# EAGLE board development board (EAGLE 6.3)
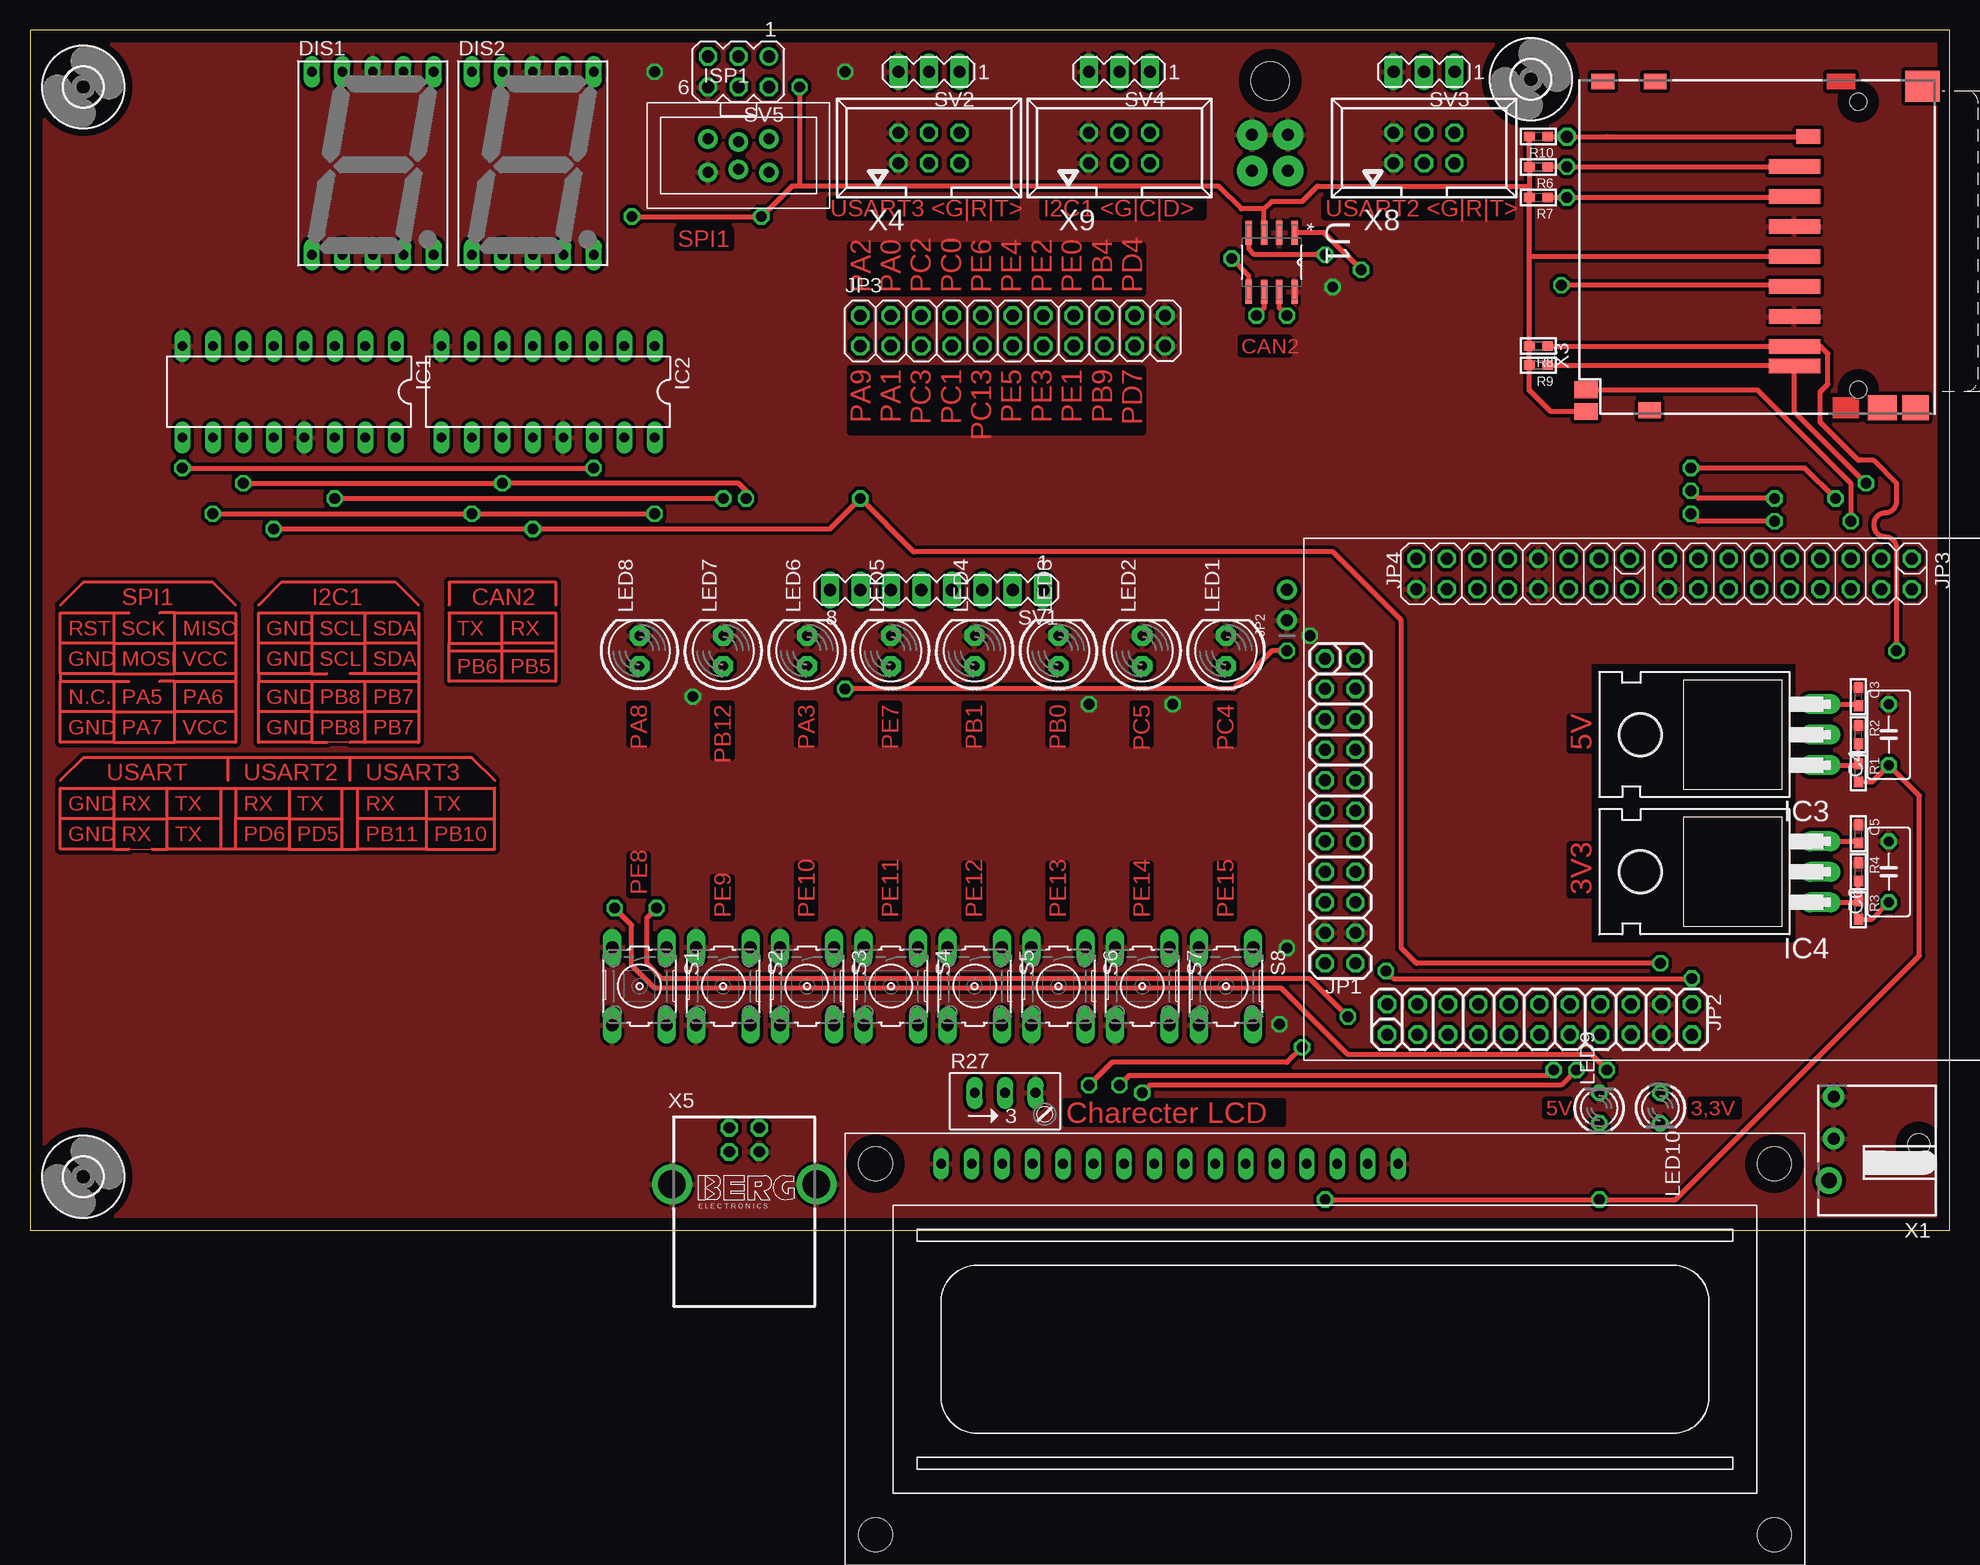
[diagram p0: board, top side]
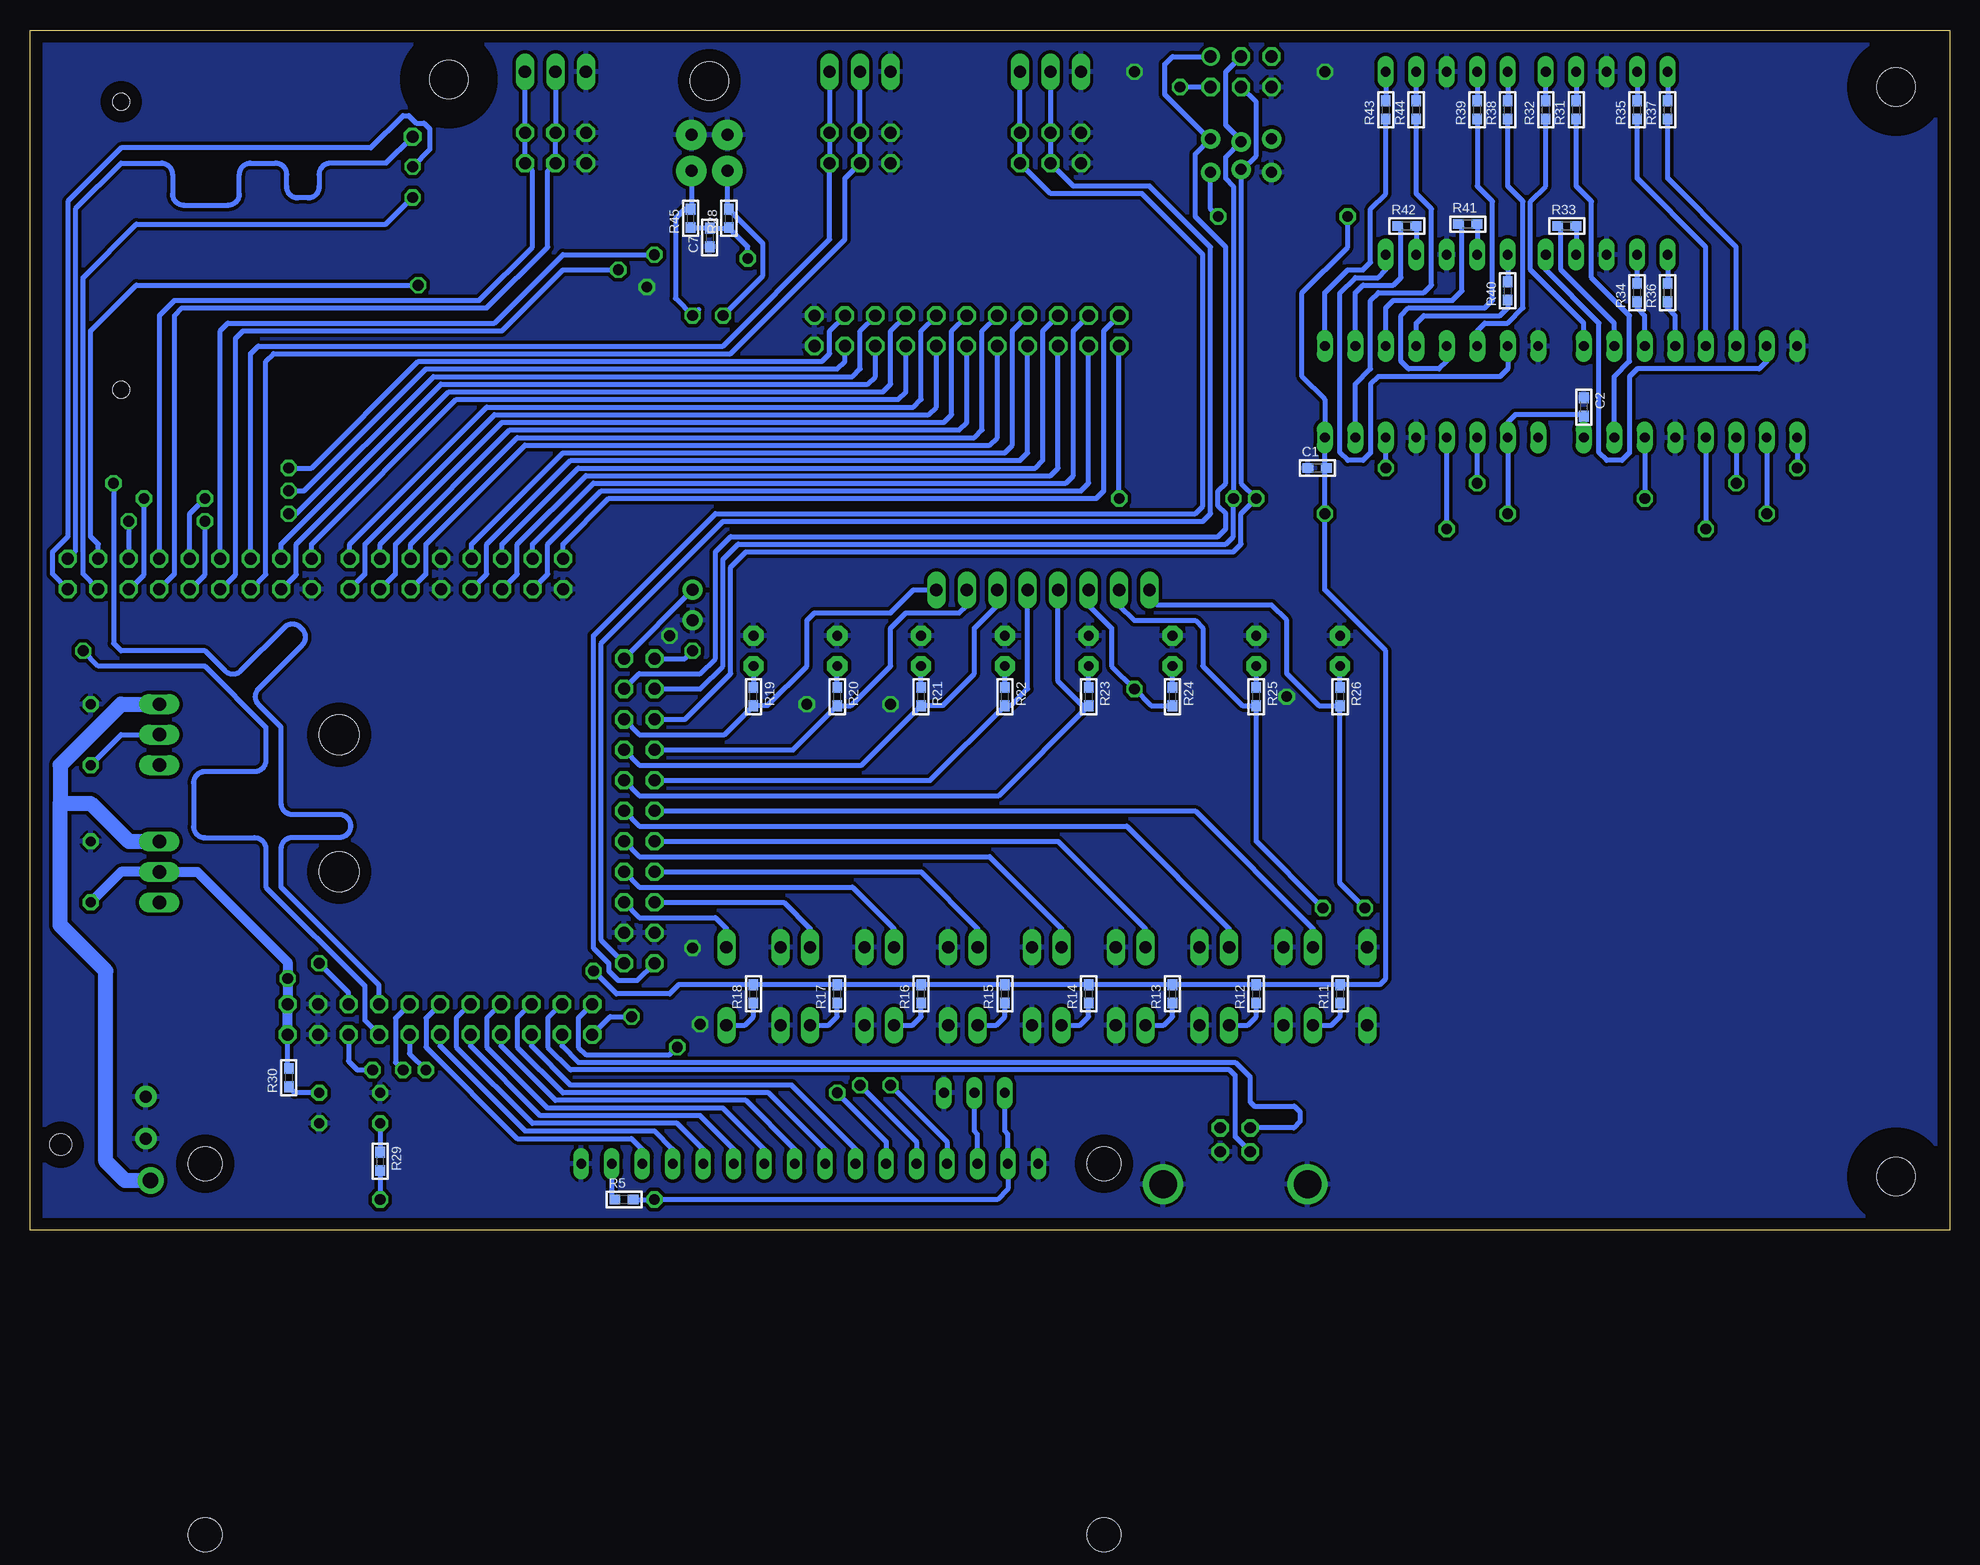
[diagram p1: board, bottom side, seen from below]

Size 160 x 100 mm. Coordinates in mm from the lower left corner, seen from the top.
Outline: 0,0 160,0 160,100 0,100 0,0
Copper layers (1*16): Top 0.035mm / dielectric 1.5mm / Bottom 0.035mm
Design rules "default *": minimum track width 10mil, minimum drill 24mil, track to track 12mil, track to pad 12mil, pad to pad 12mil, via to via 12mil, smd to smd 12mil, copper to edge 40mil, drill to drill 8mil, minimum pad ring 10mil, minimum via ring 8mil, stop-mask expansion 4mil, vias tented up to drill 0mil, thermal gap 10mil
tRestrict: area 130.2,24 to 147.2,47.1

## Footprints (pad centres in the part's own frame; a part is rotated, then mirrored left to right if it is on the bottom)
_0603 = smd 0.9 x 0.8: 1 -0.762,0; 2 0.762,0
C050-035X075 = drill 0.813 octagon: 1 -2.54,0; 2 2.54,0
HDSP-M = drill 0.813 long: 1 -5.08,-7.62; 2 -2.54,-7.62; 3 0,-7.62; 4 2.54,-7.62; 5 5.08,-7.62; 6 5.08,7.62; 7 2.54,7.62; 8 0,7.62; 9 -2.54,7.62; 10 -5.08,7.62
3,2 = hole 3.2: 0,0
DIL16 = drill 0.813 long: 1 -8.89,-3.81; 2 -6.35,-3.81; 3 -3.81,-3.81; 4 -1.27,-3.81; 5 1.27,-3.81; 6 3.81,-3.81; 7 6.35,-3.81; 8 8.89,-3.81; 9 8.89,3.81; 10 6.35,3.81; 11 3.81,3.81; 12 1.27,3.81; 13 -1.27,3.81; 14 -3.81,3.81; 15 -6.35,3.81; 16 -8.89,3.81
TO220H = drill 1.118 long: 1 -2.54,-10.16; 2 0,-10.16; 3 2.54,-10.16 | hole 3.302: 0,4.826
AVRISP-BOX = drill 0.9 pad 1.626: 1 -1.397,2.54; 2 1.397,2.54; 3 -1.143,0; 4 1.143,0; 5 -1.397,-2.54; 6 1.397,-2.54
1X02_ROUND = drill 1 pad 1.676: 1 -1.27,0; 2 1.27,0
2X11 = drill 1.016 octagon: 1 -12.7,-1.27; 2 -12.7,1.27; 3 -10.16,-1.27; 4 -10.16,1.27; 5 -7.62,-1.27; 6 -7.62,1.27; 7 -5.08,-1.27; 8 -5.08,1.27; 9 -2.54,-1.27; 10 -2.54,1.27; 11 0,-1.27; 12 0,1.27; 13 2.54,-1.27; 14 2.54,1.27; 15 5.08,-1.27; 16 5.08,1.27; 17 7.62,-1.27; 18 7.62,1.27; 19 10.16,-1.27; 20 10.16,1.27; 21 12.7,-1.27; 22 12.7,1.27
LED5MM = drill 0.813 pad 1.676 octagon: A -1.27,0; K 1.27,0
LED3MM = drill 0.813 octagon: A -1.27,0; K 1.27,0
RJ9W = drill 0.813 long: A 2.54,0.635; E -2.54,0.635; S 0,0.635
B3F-10XX = drill 1.016 long: 1 -3.251,2.261; 2 3.251,2.261; 3 -3.251,-2.261; 4 3.251,-2.261
MA08-1 = drill 1.016 long: 1 -8.89,0; 2 -6.35,0; 3 -3.81,0; 4 -1.27,0; 5 1.27,0; 6 3.81,0; 7 6.35,0; 8 8.89,0
MA03-1 = drill 1.016 long: 1 -2.54,0; 2 0,0; 3 2.54,0
MA03-2 = drill 1.016: 1 -2.54,-1.27 | drill 1.016 octagon: 2 -2.54,1.27; 3 0,-1.27; 4 0,1.27; 5 2.54,-1.27; 6 2.54,1.27
SOIC127P600X175-8N = smd 1.981 x 0.533: 1 -2.464,1.905; 2 -2.464,0.635; 3 -2.464,-0.635; 4 -2.464,-1.905; 5 2.464,-1.905; 6 2.464,-0.635; 7 2.464,0.635; 8 2.464,1.905
CPU-BOARD-JP1 = drill 1 octagon: P$1 1.27,-12.7; P$2 -1.27,-12.7; P$3 1.27,-10.16; P$4 -1.27,-10.16; P$5 1.27,-7.62; P$6 -1.27,-7.62; P$7 1.27,-5.08; P$8 -1.27,-5.08; P$9 1.27,-2.54; P$10 -1.27,-2.54; P$11 1.27,0; P$12 -1.27,0; P$13 1.27,2.54; P$14 -1.27,2.54; P$15 1.27,5.08; P$16 -1.27,5.08; P$17 1.27,7.62; P$18 -1.27,7.62; P$19 1.27,12.7; P$20 -1.27,12.7; P$21 1.27,10.16; P$22 -1.27,10.16; P$23 -3.905,18.637; P$24 -3.905,16.097; P$25 -6.445,18.637; P$26 -6.445,16.097; P$27 -8.985,18.637; P$28 -8.985,16.097; P$29 -11.525,18.637; P$30 -11.525,16.097; P$31 -14.065,18.637; P$32 -14.065,16.097; P$33 -16.605,18.637; P$34 -16.605,16.097; P$35 -19.145,18.637; P$36 -19.145,16.097; P$37 -21.685,18.637; P$38 -21.685,16.097; P$39 -24.225,18.637; P$40 -24.225,16.097; P$41 -26.765,18.637; P$42 -26.765,16.097; P$43 -29.305,18.637; P$44 -29.305,16.097; P$45 -47.625,-21.018; P$46 -47.625,-18.479; P$47 -45.085,-21.018; P$48 -45.085,-18.479; P$49 -42.545,-21.018; P$50 -42.545,-18.479; P$51 -40.005,-21.018; P$52 -40.005,-18.479; P$53 -37.465,-21.018; P$54 -37.465,-18.479; P$55 -34.925,-21.018; P$56 -34.925,-18.479; P$57 -32.385,-21.018; P$58 -32.385,-18.479; P$59 -29.845,-21.018; P$60 -29.845,-18.479; P$61 -27.305,-21.018; P$62 -27.305,-18.479; P$63 -24.115,-21.024; P$64 -24.115,-18.484; P$65 -21.575,-21.024; P$66 -21.575,-18.484; P$67 -19.035,-21.024; P$68 -19.035,-18.484; P$69 -16.495,-21.024; P$70 -16.495,-18.484; P$71 -13.955,-21.024; P$72 -13.955,-18.484; P$73 -11.415,-21.024; P$74 -11.415,-18.484; P$75 -8.875,-21.024; P$76 -8.875,-18.484; P$77 -6.335,-21.024; P$78 -6.335,-18.484
MICROFIT4SOCK = drill 1 pad 2.54: PIN1 -2,0; PIN2 1,0; PIN3 -2,-3; PIN4 1,-3 | hole 3.2: -0.5,-7.5
K375M = drill 1.3 pad 2.184: 1 -3.5,1.5 | drill 1 pad 1.8: 2 3.5,1.1; 3 0,1.1 | hole 1.8: -0.5,-6
LCD1602 = drill 0.8 long: 1 8,33.46; 2 10.54,33.46; 3 13.08,33.46; 4 15.62,33.46; 5 18.16,33.46; 6 20.7,33.46; 7 23.24,33.46; 8 25.78,33.46; 9 28.32,33.46; 10 30.86,33.46; 11 33.4,33.46; 12 35.94,33.46; 13 38.48,33.46; 14 41.02,33.46; 15 43.56,33.46; 16 46.1,33.46 | hole 2.8: 2.54,2.54; 2.54,33.46; 77.46,33.46; 77.46,2.54
SDBMF-009XXBXX2 = smd 1.2 x 4.3: 1 6.7,5.325; 2 4.2,5.325; 3 1.7,5.325; 4 -0.8,5.325; 5 -3.3,5.325; 6 -5.8,5.325; 7 -8.3,5.325; 8 -9.925,5.325 | smd 1.2 x 2: 9 9.2,4.175 | smd 2.1 x 2.4: M1 -13.4,-2 | smd 2.6 x 2.9: M2 13.4,-5.35 | smd 1.3 x 1.9: M3 -13.6,17.4; M4 13.8,16.95; M5 13.8,21.3 | smd 1.4 x 1.95: SW1 -11.9,22.7; SW3 -13.7,22.7 | smd 2.1 x 2.2: SW2 -13.4,-4.75 | hole 1.4: -11.9,0; 12.1,0
057-006-1 = drill 1 octagon: 1 -2.54,-1.27; 2 -2.54,1.27; 3 0,-1.27; 4 0,1.27; 5 2.54,-1.27; 6 2.54,1.27
PN61729-S = drill 0.95 octagon: 1 1.25,4.71; 2 -1.25,4.71; 3 -1.25,2.71; 4 1.25,2.71 | drill 2.3 pad 2.9: S1 -6.02,0; S2 6.02,0

## Placement (x,y rotation side)
C1  100n  [_0603]  52.7,63.5 0 bottom
C2  100n  [_0603]  30.48,68.58 270 bottom
C3  100n  [_0603]  152.4,44.45 270 top
C4  1u  [C050-035X075]  154.94,41.27 90 top
C5  100n  [_0603]  152.4,33.02 270 top
C6  1u  [C050-035X075]  154.94,29.84 90 top
C7  4n7  [_0603]  103.35,82.71 90 bottom
DIS1  HD-H103  [HDSP-M]  28.57,88.9 0 top
DIS2  HD-H103  [HDSP-M]  41.91,88.9 0 top
H1  MOUNT-HOLE3.2  [3,2]  4.45,95.25 0 top
H2  MOUNT-HOLE3.2  [3,2]  4.45,4.45 0 top
H3  MOUNT-HOLE3.2  [3,2]  125.09,95.89 0 top
IC1  74HC595N  [DIL16]  21.59,69.85 180 top
IC2  74HC595N  [DIL16]  43.18,69.85 180 top
IC3  317T  [TO220H]  139.06,41.27 90 top
IC4  317T  [TO220H]  139.06,29.84 90 top
ISP1  AVRISP-BOX  [AVRISP-BOX]  59.05,89.53 270 top
JP2  [1X02_ROUND]  104.78,52.07 90 top
JP3  [2X11]  81.92,74.93 0 top
LED1  [LED5MM]  99.69,48.26 90 top
LED2  [LED5MM]  92.71,48.26 90 top
LED3  [LED5MM]  85.72,48.26 90 top
LED4  [LED5MM]  78.74,48.26 90 top
LED5  [LED5MM]  71.75,48.26 90 top
LED6  [LED5MM]  64.77,48.26 90 top
LED7  [LED5MM]  57.78,48.26 90 top
LED8  [LED5MM]  50.8,48.26 90 top
LED9  [LED3MM]  130.81,10.16 90 top
LED10  [LED3MM]  135.89,10.16 270 top
R1  240  [_0603]  152.4,38.1 270 top
R2  732  [_0603]  152.4,41.27 270 top
R3  240  [_0603]  152.4,26.67 270 top
R4  400  [_0603]  152.4,29.84 270 top
R5  240  [_0603]  110.49,2.54 0 bottom
R6  47k  [_0603]  125.73,88.58 180 top
R7  47k  [_0603]  125.73,86.04 180 top
R8  47k  [_0603]  125.73,73.66 180 top
R9  47k  [_0603]  125.73,72.07 180 top
R10  47k  [_0603]  125.73,91.12 180 top
R11  240  [_0603]  50.8,19.68 90 bottom
R12  240  [_0603]  57.78,19.68 90 bottom
R13  240  [_0603]  64.77,19.68 90 bottom
R14  240  [_0603]  71.75,19.68 90 bottom
R15  240  [_0603]  78.74,19.68 90 bottom
R16  240  [_0603]  85.72,19.68 90 bottom
R17  240  [_0603]  92.71,19.68 90 bottom
R18  240  [_0603]  99.69,19.68 90 bottom
R19  100  [_0603]  99.69,44.45 270 bottom
R20  100  [_0603]  92.71,44.45 270 bottom
R21  100  [_0603]  85.72,44.45 270 bottom
R22  100  [_0603]  78.74,44.45 270 bottom
R23  100  [_0603]  71.75,44.45 270 bottom
R24  100  [_0603]  64.77,44.45 270 bottom
R25  100  [_0603]  57.78,44.45 270 bottom
R26  100  [_0603]  50.8,44.45 270 bottom
R27  [RJ9W]  81.28,10.79 0 top
R28  60  [_0603]  101.76,84.3 90 bottom
R29  150  [_0603]  130.81,5.71 270 bottom
R30  100  [_0603]  138.43,12.7 90 bottom
R31  120  [_0603]  31.11,93.34 90 bottom
R32  120  [_0603]  33.66,93.34 90 bottom
R33  120  [_0603]  31.91,83.66 0 bottom
R34  120  [_0603]  26.04,78.11 90 bottom
R35  120  [_0603]  26.04,93.34 90 bottom
R36  120  [_0603]  23.5,78.11 90 bottom
R37  120  [_0603]  23.5,93.34 90 bottom
R38  120  [_0603]  36.83,93.34 90 bottom
R39  120  [_0603]  39.37,93.34 90 bottom
R40  120  [_0603]  36.83,78.26 90 bottom
R41  120  [_0603]  40.16,83.82 0 bottom
R42  120  [_0603]  45.24,83.66 0 bottom
R43  120  [_0603]  46.99,93.34 90 bottom
R44  120  [_0603]  44.45,93.34 90 bottom
R45  60  [_0603]  104.93,84.3 90 bottom
S1  [B3F-10XX]  50.8,20.32 270 top
S2  [B3F-10XX]  57.78,20.32 270 top
S3  [B3F-10XX]  64.77,20.32 270 top
S4  [B3F-10XX]  71.75,20.32 270 top
S5  [B3F-10XX]  78.74,20.32 270 top
S6  [B3F-10XX]  85.72,20.32 270 top
S7  [B3F-10XX]  92.71,20.32 270 top
S8  [B3F-10XX]  99.69,20.32 270 top
SV1  [MA08-1]  75.56,53.34 180 top
SV2  [MA03-1]  74.93,96.52 180 top
SV3  [MA03-1]  116.2,96.52 180 top
SV4  [MA03-1]  90.81,96.52 180 top
SV5  [MA03-2]  59.05,96.52 180 top
U1  MAX13052ESA+  [SOIC127P600X175-8N]  103.5,80.64 270 top
U$1  CPU-BOARD  [CPU-BOARD-JP1]  109.22,34.92 180 top
U$57  MICROFIT4  [MICROFIT4SOCK]  102.87,88.27 180 top
X1  K375M  [K375M]  151.45,7.62 90 top
X2  HD44780LCD-1602  [LCD1602]  67.94,-27.94 0 top
X3  SDBMF  [SDBMF-009XXBXX2]  152.4,81.92 90 top
X4  057-006-1  [057-006-1]  74.93,90.17 0 top
X5  PN61729-S  [PN61729-S]  59.53,3.81 0 top
X8  057-006-1  [057-006-1]  116.2,90.17 0 top
X9  057-006-1  [057-006-1]  90.81,90.17 0 top

## Library data of the parts
C1-C3 C5 C7 JP2 R1-R26 R28-R45 = microbuilder
C4 C6 = rcl
DIS1 DIS2 = display-hp; OC_FARNELL: unknown; OC_NEWARK: unknown
H1-H3 = holes
IC1 IC2 = 74xx-eu
IC3 IC4 = linear
ISP1 LED1-LED8 X2 = adafruit
JP3 = pinhead
LED9 LED10 = led
R27 = pot
S1-S8 = switch-omron; MPN: B3F-1000; OC_FARNELL: 176432; OC_NEWARK: 36M3542
SV1-SV5 = con-lstb; OC_FARNELL: unknown; OC_NEWARK: unknown
U1 = Maxim_By_element14_Batch_1; MPN: MAX13052ESA+; OC_FARNELL: 1600112; OC_NEWARK: 99K2875; PACKAGE: SOIC-8; SUPPLIER: Maxim
U$1 = unicorn_v2
U$57 = unicorn
X1 = con-shallin
X3 = farnell
X4 X8 X9 = con-panduit; OC_FARNELL: unknown; OC_NEWARK: unknown
X5 = con-berg; OC_FARNELL: unknown; OC_NEWARK: unknown

## Nets
3.3V: C1.2 C2.2 C6.1 IC1.10 IC1.16 IC2.10 IC2.16 IC4.2 ISP1.2 R3.2 R6.2 R7.2 R8.2 R9.2 R10.2 R11.2 R12.2 R13.2 R14.2 R15.2 R16.2 R17.2 R18.2 R30.2 SV5.2 U1.3 U$1.P$43 U$1.P$44 X3.4 X3.SW3
5.0V: C4.1 IC3.2 R1.2 R5.2 R27.E R29.2 X2.2
12V: C3.2 C5.2 IC3.3 IC4.3 X1.1
CAN_RX: U1.4 U$1.P$55
CAN_TX: U1.1 U$1.P$56
CANH: R45.2 U1.7 U$57.PIN1
CANL: R28.2 U1.6 U$57.PIN2
D+: U$1.P$26 X5.3
D-: U$1.P$25 X5.2
DAC: JP2.2 U$1.P$2
DB0: U$1.P$27 X2.7
DB1: U$1.P$28 X2.8
DB2: U$1.P$29 X2.9
DB3: U$1.P$30 X2.10
DB4: U$1.P$31 X2.11
DB5: U$1.P$32 X2.12
DB6: U$1.P$33 X2.13
DB7: U$1.P$34 X2.14
E: U$1.P$36 X2.6
GND: C1.1 C2.1 C3.1 C4.2 C5.1 C6.2 C7.1 DIS1.3 DIS1.8 DIS2.3 DIS2.8 IC1.8 IC1.13 IC2.8 IC2.13 ISP1.6 JP2.1 JP3.21 JP3.22 LED1.K LED2.K LED3.K LED4.K LED5.K LED6.K LED7.K LED8.K LED9.K LED10.K R2.1 R4.1 R27.A S1.3 S1.4 S2.3 S2.4 S3.3 S3.4 S4.3 S4.4 S5.3 S5.4 S6.3 S6.4 S7.3 S7.4 S8.3 S8.4 SV2.3 SV3.3 SV4.3 SV5.6 U1.2 U1.8 U$1.P$21 U$1.P$22 U$1.P$41 U$1.P$42 U$1.P$62 U$1.P$69 U$1.P$70 U$1.P$78 U$57.PIN3 U$57.PIN4 X1.2 X1.3 X2.1 X2.16 X3.3 X3.6 X4.1 X4.2 X5.4 X5.S1 X5.S2 X8.1 X8.2 X9.1 X9.2
LED1: R19.2 SV1.1 U$1.P$6
LED2: R20.2 SV1.2 U$1.P$7
LED3: R21.2 SV1.3 U$1.P$8
LED4: R22.2 SV1.4 U$1.P$9
LED5: R23.2 SV1.5 U$1.P$10
LED6: R24.2 SV1.6 U$1.P$1
LED7: R25.2 SV1.7 U$1.P$23
LED8: R26.2 SV1.8 U$1.P$39
N$1: DIS2.5 IC2.7
N$2: IC2.6 R38.1
N$3: IC2.5 R39.1
N$4: IC2.4 R40.1
N$5: IC2.3 R41.1
N$6: IC2.2 R42.1
N$7: IC2.1 R43.1
N$8: IC2.15 R44.1
N$9: IC1.9 IC2.14
N$10: DIS1.5 IC1.7
N$11: IC1.6 R37.1
N$12: IC1.5 R35.1
N$13: IC1.4 R36.1
N$14: IC1.3 R34.1
N$15: IC1.2 R33.1
N$16: IC1.1 R32.1
N$17: IC1.15 R31.1
N$18: R5.1 X2.15
N$19: R11.1 S1.2
N$20: LED10.A R30.1
N$21: R12.1 S2.2
N$22: IC3.1 R1.1 R2.2
N$23: R13.1 S3.2
N$24: IC4.1 R3.1 R4.2
N$25: R14.1 S4.2
N$26: R15.1 S5.2
N$27: R16.1 S6.2
N$28: R17.1 S7.2
N$29: R18.1 S8.2
N$30: LED1.A R19.1
N$31: LED9.A R29.1
N$32: LED2.A R20.1
N$34: LED3.A R21.1
N$36: LED4.A R22.1
N$38: LED5.A R23.1
N$40: LED6.A R24.1
N$42: LED7.A R25.1
N$44: LED8.A R26.1
N$51: DIS1.7 R31.2
N$52: DIS1.6 R32.2
N$60: DIS1.4 R33.2
N$61: DIS1.2 R34.2
N$62: DIS1.9 R35.2
N$63: DIS1.1 R36.2
N$64: DIS1.10 R37.2
N$65: DIS2.10 R38.2
N$66: DIS2.9 R39.2
N$67: DIS2.1 R40.2
N$68: DIS2.2 R41.2
N$69: DIS2.4 R42.2
N$70: DIS2.6 R43.2
N$71: DIS2.7 R44.2
N$72: C7.2 R28.1 R45.1 U1.5
PA0: JP3.4 U$1.P$75
PA1: JP3.3 U$1.P$76
PA2: JP3.2 U$1.P$77
PA9: IC1.12 IC2.12 JP3.1 U$1.P$40
PB4: JP3.18 U$1.P$54
PB9: JP3.17 U$1.P$59
PC0: JP3.8 U$1.P$71
PC1: JP3.7 U$1.P$72
PC2: JP3.6 U$1.P$73
PC3: JP3.5 U$1.P$74
PC13: JP3.9 U$1.P$68
PD4: JP3.20 U$1.P$50
PD7: JP3.19 U$1.P$53
PE0: JP3.16 U$1.P$60
PE1: JP3.15 U$1.P$61
PE2: JP3.14 U$1.P$63
PE3: JP3.13 U$1.P$64
PE4: JP3.12 U$1.P$65
PE5: JP3.11 U$1.P$66
PE6: JP3.10 U$1.P$67
RS: U$1.P$24 X2.4
RW: U$1.P$35 X2.5
SCL: SV4.2 U$1.P$58 X9.3 X9.4
SD_IN: U$1.P$49 X3.SW1
SDA: SV4.1 U$1.P$57 X9.5 X9.6
SDIO_CK: U$1.P$47 X3.5
SDIO_CMD: R7.1 U$1.P$48 X3.2
SDIO_D0: R8.1 U$1.P$37 X3.7
SDIO_D1: R9.1 U$1.P$38 X3.8
SDIO_D2: R10.1 U$1.P$45 X3.9
SDIO_D3: R6.1 U$1.P$46 X3.1
SPI_MISO: ISP1.1 SV5.1 U$1.P$4
SPI_MOSI: IC1.14 ISP1.4 SV5.4 U$1.P$5
SPI_SCK: IC1.11 IC2.11 ISP1.3 SV5.3 U$1.P$3
SW1: S1.1 U$1.P$11
SW2: S2.1 U$1.P$12
SW3: S3.1 U$1.P$13
SW4: S4.1 U$1.P$14
SW5: S5.1 U$1.P$15
SW6: S6.1 U$1.P$16
SW7: S7.1 U$1.P$17
SW8: S8.1 U$1.P$18
USART1_RX: SV2.2 U$1.P$20 X4.3 X4.4
USART1_TX: SV2.1 U$1.P$19 X4.5 X4.6
USART2_RX: SV3.2 U$1.P$52 X8.3 X8.4
USART2_TX: SV3.1 U$1.P$51 X8.5 X8.6
VO: R27.S X2.3

## Tracks (layer width: path | path; a pad name or v marks a point on that pad's centre or on a via)
3.3V  (via drill 0.9)
  Top 0.406: R3.2 153.54,25.91 C6.1 | 124.97,87 R6.2 R10.2 | 124.97,87 R7.2 | U1.3 102.87,85.09 | 102.87,85.09 103.5,85.72 106.05,85.72 107.31,87 124.97,87 | 124.97,85.72 R7.2 | v50.16,84.45 v60.96,84.45 63.5,87 64.14,87 | 102.87,85.09 100.97,85.09 99.06,87 64.14,87 | v52.07,59.69 v36.83,59.69 v15.24,59.69 | v64.14,95.25 64.14,87 | v113.03,21.59 113.67,20.95 v138.53,20.95 | X3.SW3 126.73,68.22 124.97,69.98 R9.2 R8.2 124.97,81.11 | X3.4 124.97,81.11 | 124.97,81.11 R7.2
  Bottom 0.406: v60.96,84.45 61.59,85.09 ISP1.2 | IC1.10 v15.24,59.69 | v36.83,59.69 IC2.10 36.83,67.31 36.2,67.94 30.48,67.94 C2.2 IC1.16 | 52.07,63.5 v52.07,59.69 52.07,53.34 46.99,48.26 46.99,20.95 47.5,20.45 R11.2 R12.2 R13.2 R14.2 R15.2 R16.2 R17.2 R18.2 105.92,20.45 106.68,19.68 111.12,19.68 v113.03,21.59 | 52.07,63.5 IC2.16 52.07,69.22 53.98,71.12 53.98,78.11 50.16,81.92 v50.16,84.45 | C1.2 52.07,63.5 | R30.2 138.53,13.56 U$1.P$43 | SV5.2 v64.14,95.25
  Bottom 0.813: U$1.P$43 U$1.P$44 v138.53,20.95 138.53,22.32 146.05,29.84 IC4.2 152.4,29.84 C6.1
5.0V  (via drill 0.9)
  Top 0.406: R1.2 153.54,37.34 C4.1 157.48,36.2 157.48,22.86 137.16,2.54 v130.81,2.54 v107.95,2.54
  Bottom 0.406: R27.E 78.74,8.26 78.48,8 X2.2 78.48,3.43 79.38,2.54 v107.95,2.54 R5.2 | C4.1 152.4,41.27 IC3.2 | R29.2 v130.81,2.54
12V
  Top 0.406: IC3.3 152.27,43.81 C3.2 | IC4.3 152.27,32.38 C5.2
  Bottom 1.27: X1.1 152.07,4.12 153.67,5.71 153.67,21.59 157.48,25.4 157.48,35.56 | IC3.3 152.4,43.81 157.48,38.73 157.48,35.56 | 157.48,35.56 154.94,35.56 151.76,32.38 IC4.3
CAN_RX  (via drill 0.9)
  Top 0.406: v107.95,81.28 102.08,81.28 101.6,81.76 U1.4
  Bottom 0.406: U$1.P$55 144.15,74.93 143.51,75.56 121.28,75.56 115.57,81.28 v107.95,81.28
CAN_TX  (via drill 0.9)
  Top 0.406: v110.97,80.01 107.87,83.11 U1.1
  Bottom 0.406: U$1.P$56 144.08,53.4 142.88,54.61 142.88,74.3 142.24,74.93 120.65,74.93 115.57,80.01 v110.97,80.01
CANH  (via drill 0.9)
  Top 0.406: v104.78,76.2 104.14,76.83 U1.7
  Bottom 0.406: U$57.PIN1 104.87,85.12 R45.2 105.44,85.06 106.2,84.3 106.2,77.63 v104.78,76.2 104.27,76.71
CANL  (via drill 0.9)
  Top 0.406: U1.6 102.87,76.83 v102.23,76.2
  Bottom 0.406: U$57.PIN2 101.87,85.17 R28.2 98.9,82.2 98.9,79.53 v102.23,76.2
D+
  Bottom 0.406: U$1.P$26 116.84,17.65 116.84,15.24 114.94,13.34 60.01,13.34 59.53,12.86 59.53,7.77 X5.3
D-
  Bottom 0.406: U$1.P$25 115.67,15.34 114.3,13.97 59.53,13.97 58.28,12.72 58.28,10.66 57.94,10.32 54.61,10.32 54.13,9.84 54.13,9.05 54.66,8.52 X5.2
DAC
  Bottom 0.406: U$1.P$2 JP2.2
DB0
  Bottom 0.406: X2.7 91.19,6.73 96.52,12.06 114.94,12.06 118.2,15.34 U$1.P$27
DB1
  Bottom 0.406: X2.8 93.72,6.73 98.42,11.43 115.57,11.43 119.38,15.24 119.38,17.65 U$1.P$28
DB2
  Bottom 0.406: X2.9 96.27,6.73 100.33,10.79 116.2,10.79 120.75,15.34 U$1.P$29
DB3
  Bottom 0.406: X2.10 98.81,6.73 102.23,10.16 116.84,10.16 121.92,15.24 121.92,17.65 U$1.P$30
DB4
  Bottom 0.406: X2.11 101.34,6.73 104.14,9.53 117.47,9.53 123.28,15.34 U$1.P$31
DB5
  Bottom 0.406: X2.12 103.89,6.73 106.05,8.89 118.11,8.89 124.46,15.24 124.46,17.65 U$1.P$32
DB6
  Bottom 0.406: X2.13 106.42,6.73 107.95,8.26 118.75,8.26 125.83,15.34 U$1.P$33
DB7
  Bottom 0.406: U$1.P$34 127,17.65 127,15.24 119.38,7.62 109.86,7.62 108.97,6.73 X2.14
E  (via drill 0.9)
  Top 0.406: v128.91,13.34 127.64,12.06 93.34,12.06 v92.71,11.43
  Bottom 0.406: U$1.P$36 129.54,17.65 129.54,13.97 v128.91,13.34 | v92.71,11.43 88.64,7.37 X2.6
GND  (via drill 0.9)
  other vias: 104.78,23.5 104.14,17.14 106.68,49.53 95.25,43.81 88.27,43.81 55.24,44.45 52.07,96.52 67.94,96.52 108.58,78.58
  pour Bottom: 0,100.33 160.02,100.33 160.02,0 0,0
  pour Top: 0,100.33 160.02,100.33 160.02,0 0,0
LED1
  Bottom 0.406: 99.69,43.81 R19.2 | U$1.P$6 109.22,41.27 102.11,41.27 R19.2 | SV1.1 86.36,53.34 88.27,51.44 94.61,51.44 95.25,50.8 95.25,46.99 98.55,43.69 R19.2
LED2
  Bottom 0.406: U$1.P$7 96.39,40.01 R20.2 91.57,43.69 88.27,46.99 88.27,50.16 87,51.44 82.55,51.44 81.92,52.07 SV1.2
LED3
  Bottom 0.406: U$1.P$8 109.22,38.73 90.68,38.73 R21.2 | R21.2 85.6,43.81 | SV1.3 79.38,52.07 81.28,50.16 81.28,46.35 83.95,43.69 R21.2
LED4
  Bottom 0.406: U$1.P$9 84.96,37.47 R22.2 | R22.2 78.61,43.81 | SV1.4 76.83,45.09 78.23,43.69 R22.2
LED5
  Bottom 0.406: U$1.P$10 109.22,36.2 79.25,36.2 R23.2 | R23.2 71.88,43.81 | SV1.5 74.3,45.72 72.26,43.69 R23.2
LED6  (via drill 0.9)
  Top 0.406: v104.78,48.26 103.5,48.26 100.33,45.09 v67.94,45.09
  Bottom 0.406: U$1.P$1 105.41,47.62 v104.78,48.26 | R24.2 66.55,43.69 v67.94,45.09 69.85,46.99 69.85,50.16 71.75,52.07 SV1.6
LED7  (via drill 0.9)
  Top 0.406: v109.86,17.78 106.68,20.95 52.7,20.95 51.44,22.23 51.44,26.04 v52.23,26.83
  Bottom 0.406: U$1.P$23 111.63,17.78 v109.86,17.78 | v52.23,26.83 57.78,32.38 R25.2 58.93,43.69 62.23,46.99 62.23,50.16 62.87,50.8 67.94,50.8 69.22,52.07 SV1.7
LED8  (via drill 0.9)
  Top 0.406: v48.74,26.83 50.16,25.4 50.16,22.07 52.07,20.16 104.3,20.16 109.86,14.61 130.18,14.61 v131.44,13.34
  Bottom 0.406: v48.74,26.83 50.8,28.89 R26.2 | R26.2 50.93,43.81 | R26.2 52.58,43.69 55.24,46.35 55.24,50.8 56.52,52.07 66.04,52.07 66.67,52.7 SV1.8 | U$1.P$39 133.44,14.06 132.72,13.34 v131.44,13.34
N$1
  Bottom 0.406: IC2.7 36.83,71.75 37.47,71.12 47.62,71.12 48.26,70.48 48.26,64.77 48.9,64.14 50.16,64.14 50.8,64.77 50.8,78.11 49.53,79.38 47.62,79.38 46.99,80.01 DIS2.5
N$2
  Bottom 0.406: IC2.6 39.37,74.93 38.73,75.56 36.83,75.56 35.56,76.83 35.56,85.72 36.83,87 R38.1
N$3
  Bottom 0.406: IC2.5 41.91,72.39 42.55,71.75 45.09,71.75 45.72,72.39 45.72,76.2 45.09,76.83 38.73,76.83 38.1,77.47 38.1,85.72 39.37,87 R39.1
N$4
  Bottom 0.406: IC2.4 44.45,75.56 43.81,76.2 37.47,76.2 36.83,76.83 R40.1
N$5
  Bottom 0.406: IC2.3 46.99,76.83 46.35,77.47 41.43,77.47 40.64,78.26 40.64,83.53 R41.1
N$6
  Bottom 0.406: IC2.2 49.53,78.11 48.9,78.74 46.35,78.74 45.72,79.38 45.72,83.38 R42.1
N$7
  Bottom 0.406: IC2.1 52.07,78.11 50.16,80.01 48.9,80.01 48.26,80.64 48.26,85.09 46.99,86.36 R43.1
N$8
  Bottom 0.406: IC2.15 49.53,70.48 48.26,71.75 48.26,77.47 47.62,78.11 43.81,78.11 43.18,78.74 43.18,85.09 44.45,86.36 R44.1
N$9  (via drill 0.9)
  Top 0.406: v12.7,63.5 v46.99,63.5
  Bottom 0.406: IC1.9 v12.7,63.5 | v46.99,63.5 IC2.14
N$10
  Bottom 0.406: IC1.7 15.24,72.39 15.88,71.75 26.04,71.75 26.67,71.12 26.67,64.77 27.3,64.14 28.57,64.14 29.21,64.77 29.21,75.56 33.66,80.01 DIS1.5
N$11
  Bottom 0.406: IC1.6 17.78,81.92 23.5,87.63 R37.1
N$12
  Bottom 0.406: IC1.5 20.32,81.92 26.04,87.63 R35.1
N$13
  Bottom 0.406: IC1.4 22.86,76.2 23.5,76.83 R36.1
N$14
  Bottom 0.406: IC1.3 25.4,76.2 26.04,76.83 R34.1
N$15
  Bottom 0.406: IC1.2 27.94,75.56 32.38,80.01 32.38,83.38 R33.1
N$16
  Bottom 0.406: IC1.1 30.48,75.56 34.92,80.01 34.92,85.72 33.66,87 R32.1
N$17
  Bottom 0.406: IC1.15 27.94,71.12 26.67,72.39 26.67,76.2 29.84,79.38 29.84,85.72 31.11,87 R31.1
N$18
  Bottom 0.406: X2.15 111.5,2.79 R5.1
N$19
  Bottom 0.406: S1.2 51.51,17.07 50.8,17.78 R11.1
N$20
  Bottom 0.406: LED10.A 137.92,11.43 R30.1
N$21
  Bottom 0.406: S2.2 58.5,17.07 57.78,17.78 R12.1
N$22
  Top 0.406: IC3.1 152.27,38.73 R1.1 R2.2
N$23
  Bottom 0.406: S3.2 65.48,17.07 64.77,17.78 R13.1
N$24
  Top 0.406: IC4.1 152.27,27.3 R3.1 R4.2
N$25
  Bottom 0.406: S4.2 72.47,17.07 71.75,17.78 R14.1
N$26
  Bottom 0.406: S5.2 79.45,17.07 78.74,17.78 R15.1
N$27
  Bottom 0.406: S6.2 86.44,17.07 85.72,17.78 R16.1
N$28
  Bottom 0.406: S7.2 93.42,17.07 92.71,17.78 R17.1
N$29
  Bottom 0.406: S8.2 100.41,17.07 99.69,17.78 R18.1
N$30
  Bottom 0.406: LED1.A R19.1
N$31
  Bottom 0.406: LED9.A R29.1
N$32
  Bottom 0.406: R20.1 LED2.A
N$33
  Top 0.254: 6.99,51.44 2.54,51.44 2.54,48.9 | 6.99,51.44 6.99,48.9 | 6.99,48.9 6.99,46.35 | 6.99,46.35 12.06,46.35 | 12.06,46.35 12.06,48.9 | 12.06,48.9 12.06,51.44 | 12.06,51.44 17.14,51.44 17.14,48.9 | 17.14,48.9 17.14,46.35 | 6.99,46.35 2.54,46.35 | 2.54,46.35 2.54,48.9 | 17.14,46.35 12.06,46.35 | 17.14,48.9 12.06,48.9 | 6.99,48.9 12.06,48.9 | 6.99,48.9 2.54,48.9 | 2.54,45.72 6.99,45.72 | 6.99,45.72 6.99,43.18 | 6.99,43.18 6.99,40.64 | 6.99,40.64 12.06,40.64 | 12.06,40.64 12.06,43.18 | 12.06,43.18 12.06,45.72 | 12.06,45.72 17.14,45.72 | 17.14,45.72 17.14,43.18 | 17.14,43.18 17.14,40.64 12.06,40.64 | 6.99,40.64 2.54,40.64 2.54,43.18 | 2.54,43.18 2.54,45.72 | 17.14,43.18 12.06,43.18 | 6.99,43.18 12.06,43.18 | 6.99,43.18 2.54,43.18 | 2.54,46.35 2.54,45.72 | 17.14,46.35 17.14,45.72 | 6.99,51.44 8.26,51.44 | 12.06,51.44 10.79,51.44 | 6.99,45.72 8.26,45.72 | 12.06,45.72 10.79,45.72
N$34
  Bottom 0.406: R21.1 LED3.A
N$35
  Top 0.254: 2.54,52.07 4.45,53.98 15.24,53.98 17.14,52.07
N$36
  Bottom 0.406: R22.1 LED4.A
N$37
  Top 0.254: 34.92,48.9 34.92,51.44 39.37,51.44 | 39.37,45.72 39.37,48.9 | 39.37,48.9 39.37,51.44 | 39.37,51.44 43.81,51.44 43.81,48.9 | 43.81,48.9 43.81,48.26 | 43.81,48.26 43.81,45.72 39.37,45.72 | 43.81,48.9 39.37,48.9 | 34.92,48.9 39.37,48.9 | 39.37,45.72 34.92,45.72 34.92,48.26 | 34.92,48.26 34.92,48.9 | 34.92,48.26 43.81,48.26
N$38
  Bottom 0.406: R23.1 LED5.A
N$39
  Top 0: 26.67,40.64 24.77,40.64
  Top 0.254: 23.5,51.44 19.05,51.44 19.05,48.9 | 23.5,51.44 23.5,48.9 | 23.5,48.9 23.5,46.35 | 27.94,46.35 27.94,48.9 | 27.94,48.9 27.94,51.44 | 27.94,51.44 32.38,51.44 32.38,48.9 | 32.38,48.9 32.38,46.35 | 23.5,46.35 19.05,46.35 | 19.05,46.35 19.05,48.9 | 23.5,51.44 27.94,51.44 | 32.38,46.35 27.94,46.35 | 32.38,48.9 27.94,48.9 | 23.5,48.9 27.94,48.9 | 23.5,48.9 19.05,48.9 | 19.05,45.72 23.5,45.72 | 23.5,45.72 23.5,43.18 | 23.5,43.18 23.5,40.64 | 27.94,40.64 27.94,43.18 | 27.94,43.18 27.94,45.72 | 27.94,45.72 32.38,45.72 | 32.38,45.72 32.38,43.18 | 32.38,43.18 32.38,40.64 27.94,40.64 | 23.5,40.64 19.05,40.64 19.05,43.18 | 19.05,43.18 19.05,45.72 | 23.5,45.72 27.94,45.72 | 32.38,43.18 27.94,43.18 | 23.5,43.18 27.94,43.18 | 23.5,43.18 19.05,43.18 | 19.05,46.35 19.05,45.72 | 32.38,46.35 32.38,45.72 | 23.5,46.35 24.77,46.35 | 27.94,46.35 26.67,46.35 | 23.5,40.64 24.77,40.64 | 27.94,40.64 26.67,40.64
N$40
  Bottom 0.406: R24.1 LED6.A
N$41
  Top 0.254: 19.05,52.07 20.95,53.98 30.48,53.98 32.38,52.07
N$42
  Bottom 0.406: R25.1 LED7.A
N$43
  Top 0.254: 34.92,52.07 34.92,53.98 43.81,53.98 43.81,52.07
N$44
  Bottom 0.406: R26.1 LED8.A
N$45  (via drill 0.6)
  other vias: 4.45,4.45
N$46
  Top 0.254: 26.67,39.37 36.83,39.37 38.73,37.47 | 26.67,39.37 16.51,39.37 | 16.51,39.37 4.45,39.37 2.54,37.47 | 16.51,37.47 16.51,39.37 | 26.67,37.47 26.67,39.37
N$47
  Top 0: 8.26,31.75 10.16,31.75
  Top 0.254: 17.14,36.83 21.59,36.83 | 21.59,36.83 21.59,34.29 | 21.59,34.29 21.59,31.75 | 21.59,31.75 26.04,31.75 | 26.04,31.75 26.04,34.29 | 26.04,34.29 26.04,36.83 | 21.59,31.75 17.14,31.75 | 17.14,31.75 17.14,34.29 | 21.59,34.29 26.04,34.29 | 21.59,34.29 17.14,34.29 | 21.59,36.83 26.04,36.83 | 6.99,36.83 2.54,36.83 2.54,34.29 | 6.99,36.83 6.99,34.29 | 6.99,34.29 6.99,31.75 | 11.43,31.75 11.43,34.29 | 11.43,34.29 11.43,36.83 | 11.43,36.83 15.88,36.83 | 15.88,36.83 15.88,34.29 | 15.88,34.29 15.88,31.75 | 6.99,31.75 2.54,31.75 2.54,34.29 | 15.88,31.75 11.43,31.75 | 15.88,34.29 11.43,34.29 | 6.99,34.29 11.43,34.29 | 6.99,34.29 2.54,34.29 | 6.99,36.83 11.43,36.83 | 15.88,36.83 17.14,36.83 | 17.14,36.83 17.14,34.29 | 17.14,31.75 15.88,31.75 | 27.3,36.83 33.02,36.83 | 33.02,36.83 33.02,34.29 | 33.02,34.29 33.02,31.75 | 33.02,31.75 38.73,31.75 38.73,34.29 | 38.73,34.29 38.73,36.83 33.02,36.83 | 33.02,31.75 27.3,31.75 | 27.3,31.75 27.3,34.29 | 27.3,34.29 27.3,36.83 | 33.02,34.29 38.73,34.29 | 33.02,34.29 27.3,34.29 | 26.04,31.75 27.3,31.75 | 26.04,36.83 27.3,36.83 | 6.99,31.75 8.26,31.75 | 10.16,31.75 11.43,31.75
N$48  (via drill 0.6)
  other vias: 125.09,95.89
N$49  (via drill 0.6)
  other vias: 152.4,93.98
N$50  (via drill 0.6)
  other vias: 4.45,95.25
N$51
  Bottom 0.406: DIS1.7 R31.2
N$52
  Bottom 0.406: R32.2 DIS1.6
N$53  (via drill 0.6)
  other vias: 134.3,29.84
N$54  (via drill 0.6)
  other vias: 134.3,41.27
N$55  (via drill 0.6)
  other vias: 70.48,5.56
N$56  (via drill 0.6)
  other vias: 145.41,5.4
N$57  (via drill 0.6)
  other vias: 157.48,7.14
N$58  (via drill 0.6)
  other vias: 152.4,70.01
N$59  (via drill 0.6)
  other vias: 103.35,95.73
N$60
  Bottom 0.406: R33.2 31.11,83.63 DIS1.4
N$61
  Bottom 0.406: R34.2 DIS1.2
N$62
  Bottom 0.406: DIS1.9 R35.2
N$63
  Bottom 0.406: DIS1.1 R36.2
N$64
  Bottom 0.406: DIS1.10 R37.2
N$65
  Bottom 0.406: DIS2.10 R38.2
N$66
  Bottom 0.406: DIS2.9 R39.2
N$67
  Bottom 0.406: DIS2.1 R40.2
N$68
  Bottom 0.406: R41.2 39.37,83.79 DIS2.2
N$69
  Bottom 0.406: R42.2 44.45,83.63 DIS2.4
N$70
  Bottom 0.406: DIS2.6 R43.2
N$71
  Bottom 0.406: R44.2 DIS2.7
N$72  (via drill 0.9)
  Top 0.406: U1.5 101.6,79.53 v100.17,80.96
  Bottom 0.406: R45.1 103.41,83.53 C7.2 101.82,83.47 R28.1 100.17,81.95 v100.17,80.96
PA0
  Bottom 0.406: U$1.P$75 118.11,55.96 118.11,57.15 113.03,62.23 73.66,62.23 73.03,62.87 73.03,74.93 JP3.4
PA1
  Bottom 0.406: U$1.P$76 116.84,54.66 116.84,57.15 112.39,61.59 72.39,61.59 71.75,62.23 JP3.3
PA2
  Bottom 0.406: U$1.P$77 115.57,55.96 115.57,57.15 111.76,60.96 71.12,60.96 70.48,61.59 70.48,74.93 JP3.2
PA9  (via drill 0.9)
  Top 0.406: v135.89,22.23 115.57,22.23 114.3,23.5 114.3,50.8 108.58,56.52 73.66,56.52 v69.22,60.96 66.67,58.42 v41.91,58.42 v20.32,58.42
  Bottom 0.406: U$1.P$40 133.44,19.78 v135.89,22.23 | v69.22,60.96 JP3.1 | v41.91,58.42 IC2.12 | IC1.12 v20.32,58.42
PB4  (via drill 0.9)
  Top 0.406: v145.41,59.05 139.06,59.05 v138.43,59.69
  Bottom 0.406: U$1.P$54 146.62,53.4 145.41,54.61 v145.41,59.05 | v138.43,59.69 137.79,59.69 126.36,71.12 91.44,71.12 90.81,71.75 90.81,74.93 JP3.18
PB9
  Bottom 0.406: U$1.P$59 139.06,57.15 125.73,70.48 90.17,70.48 89.53,71.12 JP3.17
PC0
  Bottom 0.406: U$1.P$71 123.19,55.96 123.19,57.15 115.57,64.77 78.74,64.77 78.11,65.41 78.11,74.93 JP3.8
PC1
  Bottom 0.406: U$1.P$72 121.92,54.66 121.92,57.15 114.94,64.14 77.47,64.14 76.83,64.77 JP3.7
PC2
  Bottom 0.406: U$1.P$73 120.65,55.96 120.65,57.15 114.3,63.5 76.2,63.5 75.56,64.14 75.56,74.93 JP3.6
PC3
  Bottom 0.406: U$1.P$74 119.38,54.66 119.38,57.15 113.67,62.87 74.93,62.87 74.3,63.5 JP3.5
PC13
  Bottom 0.406: U$1.P$68 127.05,54.61 127,54.61 127,57.15 118.75,65.41 80.01,65.41 79.38,66.04 JP3.9
PD4  (via drill 0.9)
  Top 0.406: v150.5,60.96 147.96,63.5 v138.43,63.5
  Bottom 0.406: U$1.P$50 151.7,53.4 150.5,54.61 v150.5,60.96 | v138.43,63.5 136.53,63.5 127.64,72.39 93.98,72.39 93.34,73.03 93.34,74.93 JP3.20
PD7  (via drill 0.9)
  Top 0.406: v145.41,60.96 139.06,60.96 v138.43,61.59
  Bottom 0.406: U$1.P$53 146.69,59.69 v145.41,60.96 | v138.43,61.59 137.16,61.59 127,71.75 92.71,71.75 92.08,72.39 JP3.19
PE0
  Bottom 0.406: U$1.P$60 139,53.4 137.79,54.61 137.79,57.15 125.09,69.85 88.9,69.85 88.27,70.48 88.27,74.93 JP3.16
PE1
  Bottom 0.406: U$1.P$61 136.53,57.15 124.46,69.22 87.63,69.22 87,69.85 JP3.15
PE2
  Bottom 0.406: U$1.P$63 133.35,55.96 133.35,57.15 121.92,68.58 86.36,68.58 85.72,69.22 85.72,74.93 JP3.14
PE3
  Bottom 0.406: U$1.P$64 132.13,54.61 132.08,54.61 132.08,57.15 121.28,67.94 85.09,67.94 84.45,68.58 JP3.13
PE4
  Bottom 0.406: U$1.P$65 130.81,55.96 130.81,57.15 120.65,67.31 83.82,67.31 83.19,67.94 83.19,74.93 JP3.12
PE5
  Bottom 0.406: U$1.P$66 129.59,54.61 129.54,54.61 129.54,57.15 120.02,66.67 82.55,66.67 81.92,67.31 JP3.11
PE6
  Bottom 0.406: U$1.P$67 128.27,55.96 128.27,57.15 119.38,66.04 81.28,66.04 80.64,66.67 80.64,74.93 JP3.10
RS  (via drill 0.9)
  Top 0.406: v106.05,15.24 104.78,13.97 90.17,13.97 v88.27,12.06
  Bottom 0.406: v106.05,15.24 106.68,14.61 113.67,14.61 114.3,15.24 114.3,17.65 U$1.P$24 | v88.27,12.06 83.56,7.37 X2.4
RW  (via drill 0.9)
  Top 0.406: v127,13.34 126.52,12.86 91.6,12.86 v90.81,12.06
  Bottom 0.406: U$1.P$35 128.37,14.7 v127,13.34 | v90.81,12.06 86.11,7.37 X2.5
SCL
  Bottom 0.406: U$1.P$58 141.54,53.4 140.34,54.61 140.34,72.39 139.7,73.03 101.6,73.03 92.08,82.55 92.08,87.63 X9.3 X9.4 SV4.2
SD_IN  (via drill 0.9)
  Top 0.406: X3.SW1 143.98,70.02 151.76,62.23 v151.76,59.05
  Bottom 0.406: v151.76,59.05 U$1.P$49
SDA
  Bottom 0.406: U$1.P$57 141.6,73.03 140.97,73.66 102.23,73.66 93.34,82.55 X9.5 X9.6 SV4.1
SDIO_CK  (via drill 0.9)
  Top 0.406: X3.5 146.95,78.74 v127.64,78.74
  Bottom 0.406: U$1.P$47 154.31,57.15 154.94,57.78 154.94,74.93 151.13,78.74 v127.64,78.74
SDIO_CMD  (via drill 0.9)
  Top 0.406: R7.1 v128.11,86.04 147.07,86.04 X3.2
  Bottom 0.406: U$1.P$48 155.57,54.67 155.57,79.38 151.13,83.82 130.33,83.82 v128.11,86.04
SDIO_D0  (via drill 0.9)
  Top 0.406: v155.57,48.26 155.57,56.83 arc90 154.63,57.77 arc-90 153.69,58.71 153.69,58.82 arc-90 154.63,59.76 arc90 155.57,60.7 155.57,62.23 153.67,64.14 152.4,64.14 149.22,67.31 149.22,69.85 149.86,70.48 149.86,73.03 149.22,73.66 147.07,73.66 X3.7 126.49,73.61 R8.1
  Bottom 0.406: U$1.P$37 132.08,17.46 132.08,20.32 140.34,28.57 140.34,31.75 arc-90 141.28,32.69 145.43,32.69 arc90 146.37,33.63 146.37,37.26 arc90 145.43,38.2 141.28,38.2 arc-90 140.34,39.14 140.34,41.91 145.41,46.99 154.31,46.99 v155.57,48.26
SDIO_D1  (via drill 0.9)
  Top 0.406: v153.03,62.23 147.07,68.19 X3.8 147.07,72.07 R9.1
  Bottom 0.406: U$1.P$38 130.91,20.41 139.06,28.57 139.06,31.78 arc90 138.12,32.72 134.2,32.72 arc-90 133.26,33.66 133.26,33.68 arc-90 134.2,34.62 138.12,34.62 arc90 139.06,35.56 139.06,41.91 140.94,43.78 arc90 140.94,45.11 137.31,48.74 arc-90 137.31,50.07 137.46,50.22 arc-90 138.79,50.22 142.42,46.59 arc90 143.75,46.59 145.41,48.26 152.4,48.26 153.03,48.9 v153.03,62.23
SDIO_D2  (via drill 1)
  Top 0.406: R10.1 v128.11,91.12 131.44,91.12 X3.9
  Bottom 0.406: U$1.P$45 156.21,56.58 156.21,85.09 152.4,88.9 149.06,88.9 arc90 148.12,87.96 148.12,86.35 arc-90 147.18,85.41 143.49,85.41 arc-90 142.54,86.35 142.54,87.96 arc90 141.6,88.9 139.54,88.9 arc90 138.6,87.96 138.6,86.94 arc-90 137.66,86 136.84,86 arc-90 135.9,86.94 135.9,87.96 arc90 134.96,88.9 130.33,88.9 v128.11,91.12
SDIO_D3  (via drill 0.9)
  Top 0.406: R6.1 126.49,88.61 v128.11,88.61 X3.1
  Bottom 0.406: U$1.P$46 158.12,54.67 158.12,56.52 156.84,57.78 156.84,85.72 152.4,90.17 131.6,90.17 128.91,92.87 128.43,92.87 127.79,92.23 127.16,92.23 126.68,91.76 126.68,90.04 v128.11,88.61
SPI_MISO
  Bottom 0.406: U$1.P$4 109.22,46.35 104.14,46.35 102.87,47.62 102.87,56.52 101.6,57.78 60.96,57.78 60.33,58.42 60.33,59.69 60.96,60.33 60.96,61.59 60.33,62.23 60.33,81.92 62.87,84.45 62.87,89.66 ISP1.1 61.72,90.93 65.41,94.61 65.41,97.16 64.77,97.79 SV5.1
SPI_MOSI  (via drill 0.9)
  Top 0.406: v25.4,60.96 v57.78,60.96
  Bottom 0.406: IC1.14 v25.4,60.96 | U$1.P$5 105.41,42.55 101.6,46.35 101.6,55.24 100.33,56.52 59.69,56.52 59.05,57.15 59.05,59.69 v57.78,60.96 59.05,62.23 ISP1.4 58.93,88.39 57.78,89.53 57.78,93.98 SV5.4
SPI_SCK  (via drill 0.9)
  Top 0.406: v17.78,62.23 v39.37,62.23 59.05,62.23 59.69,61.59 v59.69,60.96
  Bottom 0.406: U$1.P$3 104.14,45.09 102.23,46.99 102.23,55.88 100.97,57.15 60.33,57.15 59.69,57.78 v59.69,60.96 59.69,87 60.33,87.63 60.33,89.41 ISP1.3 59.05,90.81 60.33,92.08 60.33,96.52 SV5.3 | IC1.11 v17.78,62.23 | v39.37,62.23 IC2.11
SW1
  Bottom 0.406: U$1.P$11 62.87,34.92 53.06,25.12 S1.1
SW2
  Bottom 0.406: U$1.P$12 109.22,33.66 68.58,33.66 60.05,25.12 S2.1
SW3
  Bottom 0.406: U$1.P$13 74.3,32.38 67.03,25.12 S3.1
SW4
  Bottom 0.406: U$1.P$14 109.22,31.11 80.01,31.11 74.02,25.12 S4.1
SW5
  Bottom 0.406: U$1.P$15 85.72,29.84 81,25.12 S5.1
SW6
  Bottom 0.406: U$1.P$16 109.22,28.57 91.44,28.57 87.99,25.12 S6.1
SW7
  Bottom 0.406: U$1.P$17 97.16,27.3 94.97,25.12 S7.1
SW8
  Bottom 0.406: U$1.P$18 109.22,26.04 102.87,26.04 101.96,25.12 S8.1
USART1_RX
  Bottom 0.406: SV2.2 X4.4 X4.3 73.03,87 66.67,87 61.59,81.92 61.59,59.69 62.23,59.05 102.23,59.05 112.39,48.9 112.39,24.13 U$1.P$20
USART1_TX
  Bottom 0.406: SV2.1 X4.6 X4.5 74.93,86.36 67.31,86.36 62.23,81.28 62.23,60.33 62.87,59.69 102.87,59.69 113.03,49.53 113.03,23.5 111.76,22.23 111.76,21.59 110.97,20.8 109.38,20.8 U$1.P$19
USART2_RX
  Bottom 0.406: U$1.P$52 147.96,54.67 147.96,76.2 147.32,76.83 121.92,76.83 116.84,81.92 116.84,88.27 X8.3 X8.4 SV3.2
USART2_TX
  Bottom 0.406: U$1.P$51 149.22,76.2 147.96,77.47 122.56,77.47 118.11,81.92 118.11,88.27 X8.5 X8.6 SV3.1
VO
  Bottom 0.406: X2.3 81.03,8 81.28,8.26 R27.S

## Text on the board
Top: USART3 <G|R|T> | I2C1 <G|C|D> | USART2 <G|R|T> | SPI1 | PA2 / PA0 / PC2 / PC0 / PE6 / PE4 / PE2 / PE0 / PB4 / PD4 | CAN2 | PA9 / PA1 / PC3 / PC1 / PC13 / PE5 / PE3 / PE1 / PB9 / PD7 | SPI1 | I2C1 | CAN2 | RST | SCK | MISO | GND | SCL | SDA | TX | RX | GND | MOSI | VCC | GND | SCL | SDA | PB6 | PB5 | N.C. | PA5 | PA6 | GND | PB8 | PB7 | PA8 | PB12 | PA3 | PE7 | PB1 | PB0 | PC5 | PC4 | GND | PA7 | VCC | GND | PB8 | PB7 | 5V | USART | USART2 | USART3 | GND | RX | TX | RX | TX | RX | TX | GND | RX | TX | PD6 | PD5 | PB11 | PB10 | PE8 | 3V3 | PE9 | PE10 | PE11 | PE12 | PE13 | PE14 | PE15 | 5V | 3,3V | Charecter LCD